# Altium PCB PCBAdamV3.PcbDoc (part 2 of 2)
Units mm, origin at the board's own origin, x right, y up, seen from the top; angles counter-clockwise.
Board outline 100 x 110 mm, 2 copper layers (Top Layer, Bottom Layer); 253 components, 163 nets, 741 pads, 188 vias.
Unrouted connection lines stored in the file: 6.
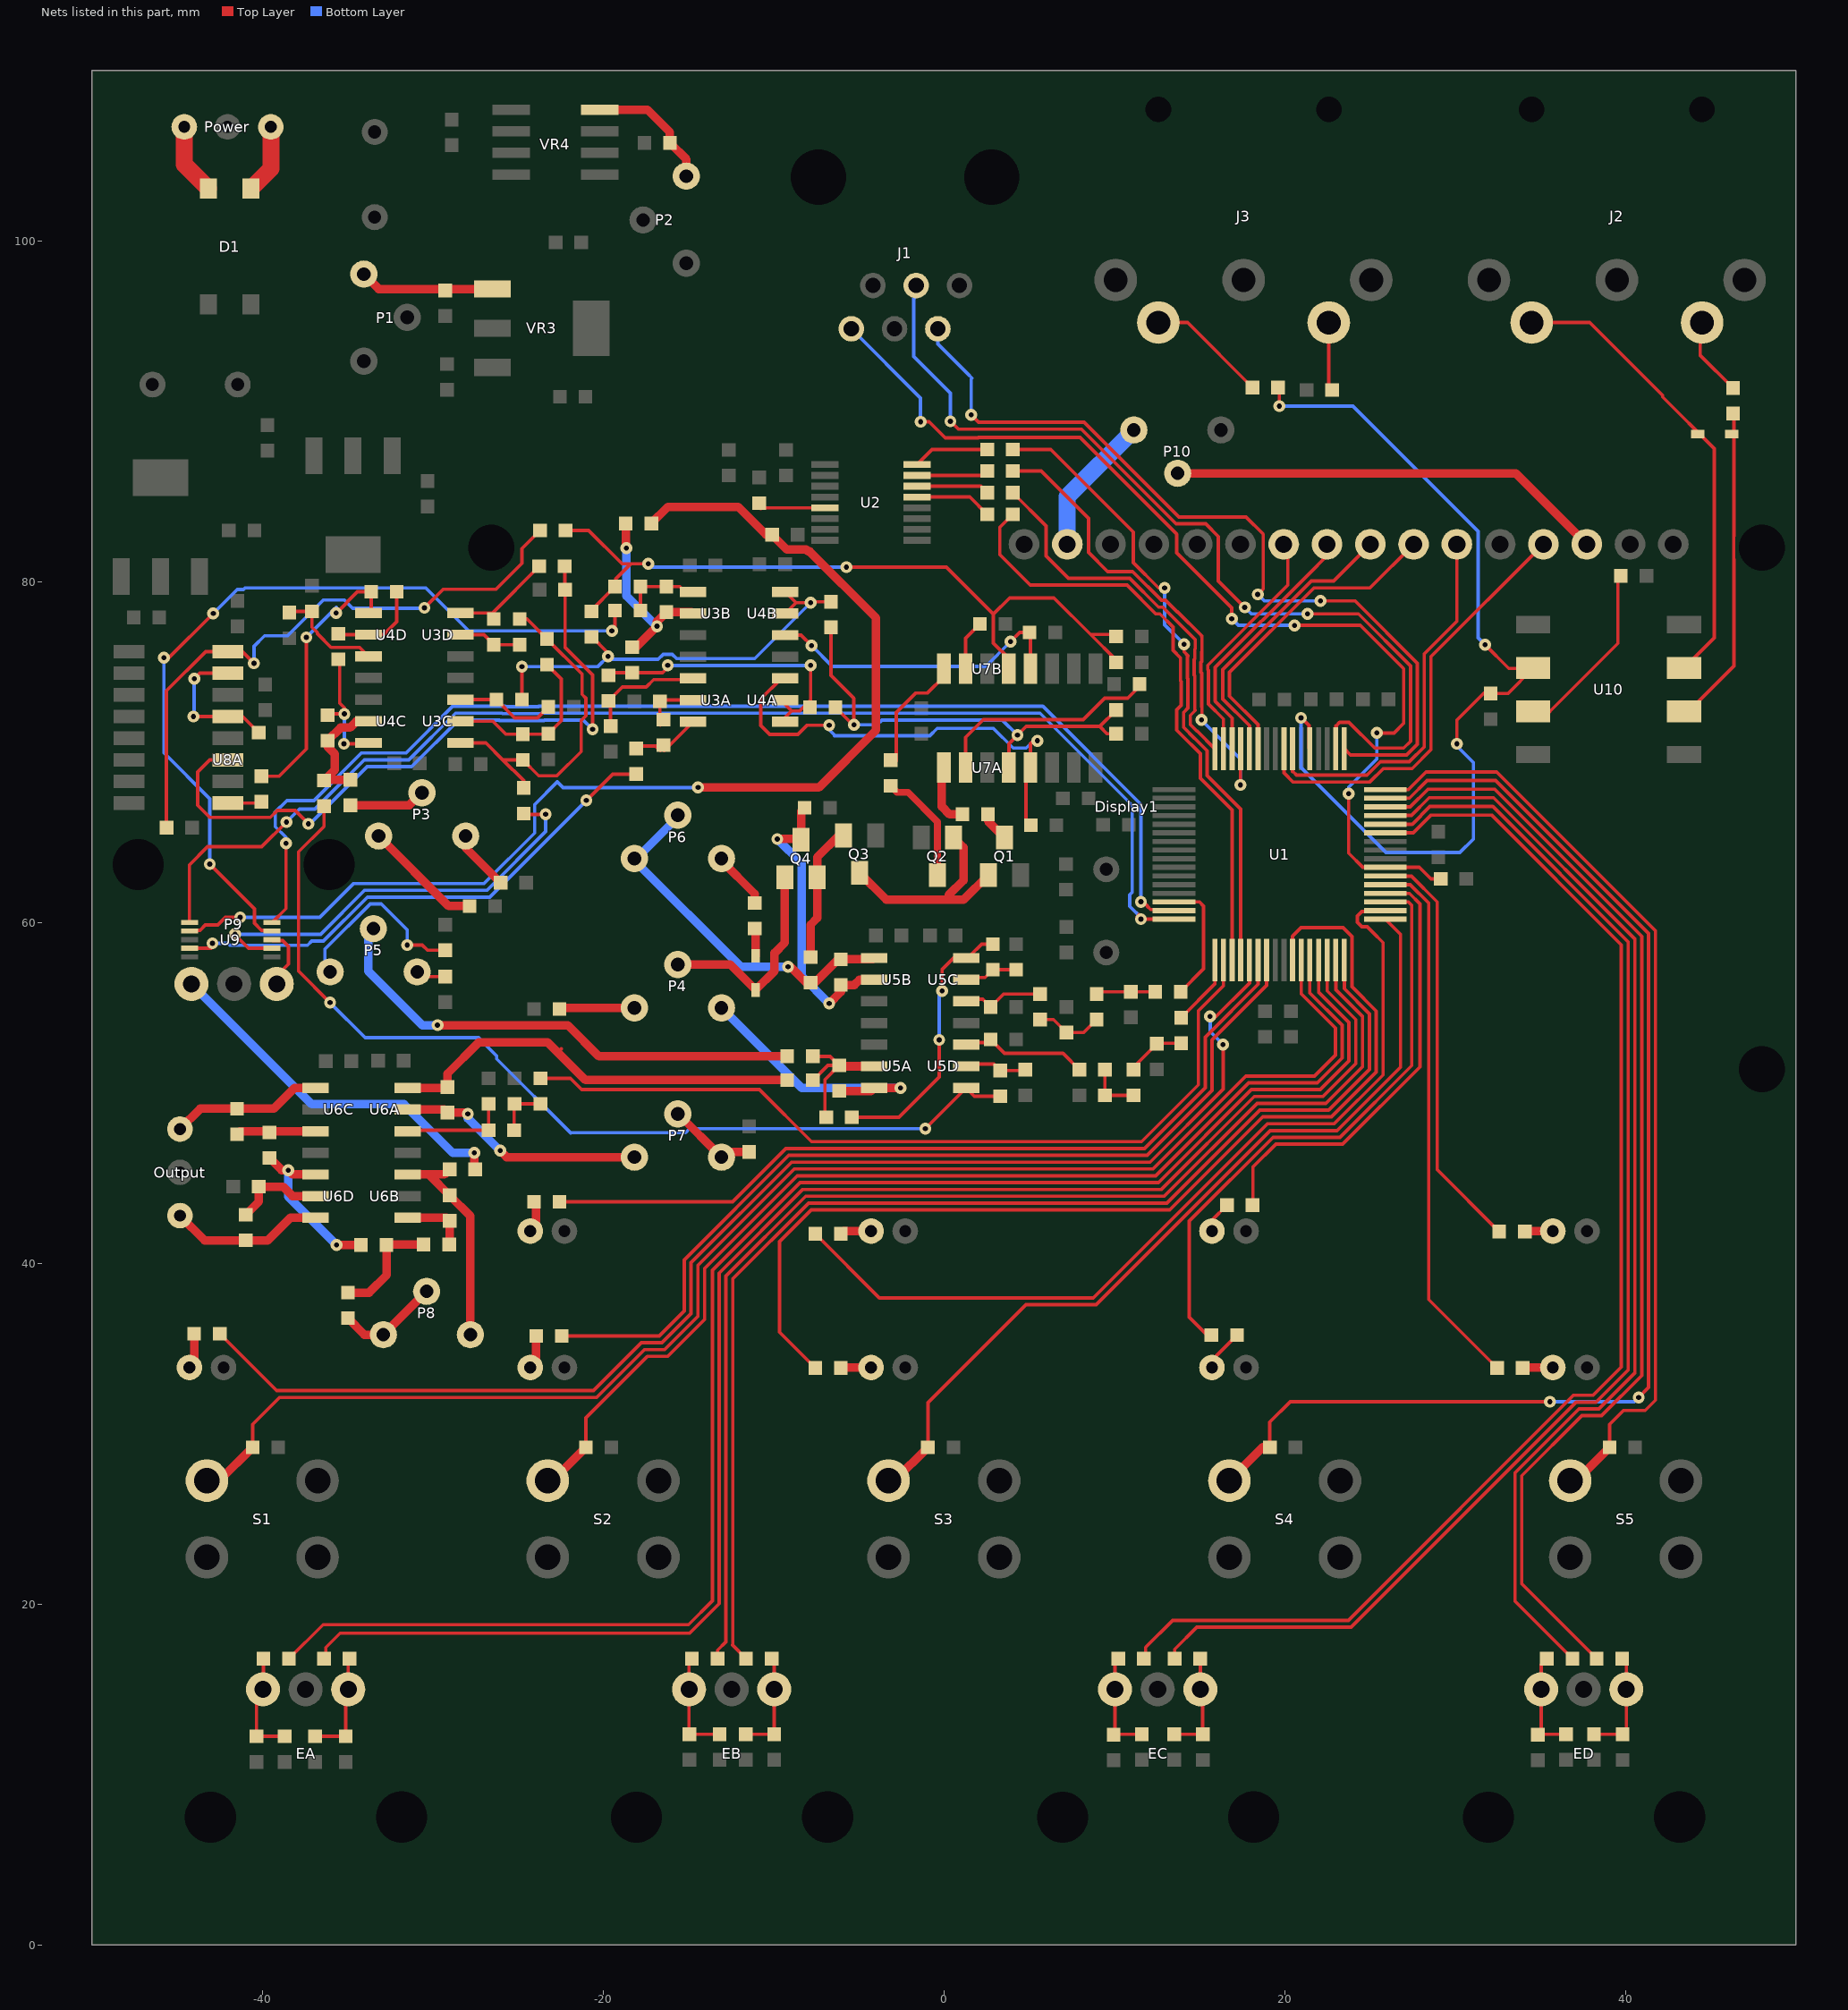
[diagram p2: the nets of this part, all layers, seen from the top]

## Via types
v1: diameter 0.7, hole 0.3, Top Layer to Bottom Layer, 171 vias
v2: diameter 1, hole 0.5, Top Layer to Bottom Layer, 17 vias

## Nets (pads, with @x,y where several pads share a name; then routed paths per layer and width w, separated by ;. In a path a pad name is that pad's centre, name@x,y a point inside that pad or via, vN(x,y) a via of type N, cw(c..) or ccw(c..) an arc to the next point about the centre after c; other vN are vias at no path point) (continued)
NetC19_2: C19.2 R17.1 U9.2 | length 69.3
  Top Layer w0.2: U9.2@-44.272,59.495 -44.222,59.545 -43.648,59.545 -43.342,59.851 -42.613,59.851 -42.164,60.3 v1(-41.3,60.3)
  Top Layer w0.5: R17.1@-17.17,83.414 -16.205,84.379 -12.068,84.379 -10.442,82.753 C19.2@-10.084,82.753 -9.22,81.89 -8.088,81.89 -7.971,81.773 -7.884,81.773 -3.988,77.876 -3.988,71.272 -7.341,67.92 v1(-14.427,67.92)
  Bottom Layer w0.2: v1(-41.3,60.3) -36.619,60.3 -34.631,62.287 -26.982,62.287 -24.018,65.251 -24.018,66.914 -22.682,68.25 -22.352,67.92 v1(-14.427,67.92)
NetC20_1: C20.1 U2.13 | length 3.8
  Top Layer w0.2: C20.1@-10.744,84.277 -10.693,84.328 U2.13@-6.985,84.328
NetC23_1: C23.1 R19.2 R36.2 U4B.1 U4B.2 | length 26.2
  Top Layer w0.2: C23.1@-24.765,73.076 v1(-24.765,75.006) ; R19.2@-20.701,76.81 -19.71,75.819 v1(-19.71,75.616) ; U4B.2@-9.314,78.13 -8.679,78.765 ; U4B.1@-9.314,79.4 -8.679,78.765 ; v1(-7.823,78.765) -8.679,78.765 ; v1@-7.772,78.816 R36.2@-6.629,78.816
  Bottom Layer w0.2: v1(-24.765,75.006) -20.32,75.006 v1(-19.71,75.616) -19.533,75.438 -16.769,75.438 -16.474,75.732 -15.936,75.732 -15.686,75.482 -11.106,75.482 v1(-7.823,78.765)
NetC23_2: C23.2 R22.1 U3C.3 | length 5.9
  Top Layer w0.2: U3C.3@-28.364,73.076 C23.2@-26.264,73.076 -25.197,72.009 -23.851,72.009 R22.1@-23.216,72.644
NetC25_1: C25.1 R20.2 R37.1 U4A.1 U4A.2 | length 17.2
  Top Layer w0.2: C25.1@-19.685,74.498 -19.533,74.651 R20.2@-18.288,74.651 -16.51,74.651 -16.205,74.955 v1(-16.205,75.082) ; U4A.1@-9.314,71.78 -9.314,72.034 -8.933,72.415 ; U4A.2@-9.314,73.05 -9.314,72.796 -8.933,72.415 ; v1(-7.823,75.082) -7.823,73.05 -8.458,72.415 -8.933,72.415
  Bottom Layer w0.2: v1(-16.205,75.082) v1(-7.823,75.082)
NetC25_2: C25.2 R25.1 U3A.3 | length 7.1
  Top Layer w0.2: R25.1@-19.558,71.526 -19.558,72.873 C25.2@-19.685,73 -18.872,73.812 -17.475,73.812 -17.037,74.251 -14.714,74.251 U3A.3@-14.714,74.32
NetC28_1: C28.1 R21.1 R24.1 U3C.2 | length 10.2
  Top Layer w0.2: U3C.2@-28.364,71.806 -26.467,71.806 -25.705,71.044 R21.1@-24.714,71.044 -23.241,71.044 R24.1@-23.216,71.069 -22.454,71.831 -22.454,74.295 C28.1@-23.292,75.133
NetC28_2: C28.2 R16.1 R21.2 R29.2 U3C.1 | length 20.4
  Top Layer w0.2: U3C.1@-28.364,70.536 -26.873,70.536 -25.883,69.545 ; R29.2@-24.892,77.8 -24.46,77.8 C28.2@-23.292,76.632 -21.234,74.574 -21.234,73.386 -21.017,73.168 -21.017,72.12 -21.285,71.852 -21.285,70.028 -22.708,68.605 -23.774,68.605 R21.2@-24.714,69.545 -25.883,69.545 ; R16.1@-24.663,67.894 -24.663,68.326 -25.883,69.545
NetC33_2: C33.2 U4A.3 U7A.5 | length 27.4
  Top Layer w0.2: U4A.3@-9.314,74.32 -9.543,74.32 -10.744,73.12 -10.744,71.552 -10.223,71.031 -8.564,71.031 -8.018,71.577 v1(-6.731,71.577) ; U7A.5@4.953,69.088 4.811,68.946 4.811,65.928 C33.2@5.156,65.583 ; U7A.5@5.08,69.088 5.08,70.485 5.258,70.663 v1(5.486,70.663)
  Bottom Layer w0.2: v1(-6.731,71.577) -7.006,71.577 -6.426,70.998 -6.426,70.953 -0.833,70.953 -0.396,71.389 2.906,71.389 4.064,70.231 4.826,70.231 5.258,70.663 v1(5.486,70.663)
NetC34_2: C34.2 U4B.3 U7B.5 | length 18
  Top Layer w0.2: U4B.3@-9.314,76.86 -8.382,76.86 v1(-7.772,76.251) ; v1@3.759,76.479 v1(3.912,76.479) 4.445,77.013 C34.2@5.029,77.013 ; U7B.5@5.08,74.888 5.08,76.733 C34.2@5.131,76.784
  Bottom Layer w0.2: v1(-7.772,76.251) -6.553,75.032 2.464,75.032 v1(3.912,76.479)
NetC36_1: C36.1 Q4.3 R57.2 U5B.2 | length 18
  Top Layer w0.2: U5B.2@-4.097,56.642 U5B.2@-3.842,56.642
  Top Layer w0.5: v1(-9.779,64.897) -8.425,64.897 Q4.3@-8.382,64.854 -8.382,66.523 R57.2@-8.179,66.726 ; v1(-6.731,55.245) -6.045,55.931 C36.1@-6.045,56.337 -5.258,56.337 -4.953,56.642 U5B.2@-4.097,56.642
  Bottom Layer w0.5: v1(-9.779,64.897) -8.344,63.462 -8.344,56.858 v1(-6.731,55.245)
NetC36_2: C36.2 P6.2 P6.3 R64.1 U5B.1 | length 21.3
  Top Layer w0.5: v1(-9.144,57.404) -9.017,57.404 -7.95,56.337 -7.696,56.337 -6.198,57.836 C36.2@-6.045,57.836 -4.173,57.836 U5B.1@-4.097,57.912
  Bottom Layer w0.5: P6.3@-15.621,66.167 -18.161,63.627 -11.938,57.404 v1(-9.144,57.404)
NetC39_2: C39.2 R66.2 R67.1 | length 3.5
  Top Layer w0.2: R67.1@8.966,55.804 9.093,55.931 C39.2@10.973,55.931 R66.2@12.395,55.931
NetC40_2: C40.2 R67.2 R68.1 | length 4
  Top Layer w0.2: R68.1@5.639,54.305 6.426,54.305 C40.2@7.188,53.543 8.204,53.543 R67.2@8.966,54.305
NetC41_2: C41.2 R72.2 R73.1 | length 3.5
  Top Layer w0.2: R73.1@11.125,51.359 11.125,51.511 C41.2@12.497,52.883 12.522,52.908 R72.2@13.919,52.908
NetC42_2: C42.2 R73.2 R74.1 | length 3.2
  Top Layer w0.2: R74.1@9.449,51.359 C42.2@9.449,49.86 R73.2@11.125,49.86
NetC43_2: C43.2 R77.2 R78.1 | length 3
  Top Layer w0.2: R78.1@-25.222,47.803 C43.2@-25.222,49.327 ; C43.2@-25.197,49.352 R77.2@-23.673,49.352
NetC44_2: C44.2 R78.2 U6A.3 | length 6.4
  Top Layer w0.2: U6A.3@-31.463,47.752 -31.412,47.803 R78.2@-26.721,47.803 C44.2@-26.721,49.479
NetC47_1: C47.1 C48.2 P8.1 U6B.3 | length 13
  Top Layer w0.5: U6B.3@-31.463,45.212 -30.226,45.212 ; C48.2@-29.007,45.517 -29.312,45.212 -30.226,45.212 ; P8.1@-27.783,35.814 -27.783,42.769 C47.1@-29.007,43.993 -30.226,45.212
NetC47_2: C47.2 R83.2 U6B.1 | length 3.9
  Top Layer w0.5: U6B.1@-31.463,42.672 -29.185,42.672 C47.2@-29.007,42.494 -29.007,41.123 R83.2@-29.032,41.097
NetC48_1: C48.1 P9.1 | length 21.7
  Top Layer w0.5: v1(-27.559,46.482) -27.559,45.568 C48.1@-27.508,45.517
  Bottom Layer w0.5: P9.1@-44.152,56.396 -37.095,49.339 -31.686,49.339 -28.829,46.482 v1(-27.559,46.482)
NetC49_1: C49.1 R81.1 R83.1 | length 6.7
  Top Layer w0.5: R81.1@-34.976,38.278 -33.731,38.278 -32.69,39.319 -32.69,41.097 R83.1@-30.531,41.097
NetC49_2: C49.2 R84.1 U6D.3 | length 10.1
  Top Layer w0.5: R84.1@-39.573,46.177 -38.862,45.466 v1(-38.481,45.466) -38.227,45.212 U6D.3@-36.863,45.212 ; v1(-35.636,41.072) C49.2@-34.214,41.072
  Bottom Layer w0.5: v1(-38.481,45.466) -38.481,43.917 v1(-35.636,41.072)
NetC50_2: C50.2 EA.2 R101.2 R109.2 | length 6.4
  Top Layer w0.2: R109.2@-39.929,16.797 -39.929,15.027 EA.2@-39.956,15 -40.335,14.621 R101.2@-40.335,12.243 C50.2@-38.684,12.243
NetC51_2: C51.2 EA.1 R102.1 R110.2 | length 6.3
  Top Layer w0.2: C51.2@-36.906,12.243 R102.1@-35.103,12.243 EA.1@-35.103,14.853 ; EA.1@-34.956,15 -34.956,16.721 R110.2@-34.874,16.803
NetC52_2: C52.2 EB.2 R103.2 R111.2 | length 6.3
  Top Layer w0.2: R111.2@-14.783,16.797 -14.956,16.624 EB.2@-14.956,15 -14.956,12.391 R103.2@-14.935,12.37 C52.2@-13.157,12.37
NetC53_2: C53.2 EB.1 R104.1 R112.2 | length 6.2
  Top Layer w0.2: C53.2@-11.633,12.37 R104.1@-9.957,12.37 ; R112.2@-10.109,16.803 -9.956,16.65 EB.1@-9.956,15 R104.1@-9.957,12.37
NetC54_2: C54.2 EC.2 R105.2 R113.2 | length 6.1
  Top Layer w0.2: R113.2@10.236,16.797 10.044,16.605 EC.2@10.044,15 10.044,12.424 9.99,12.37 C54.2@11.608,12.37
NetC55_2: C55.2 EC.1 R106.1 R114.2 | length 6
  Top Layer w0.2: C55.2@13.513,12.37 15.181,12.37 EC.1@15.181,14.863 ; R114.2@15.037,16.803 15.044,16.796 EC.1@15.044,15
NetC56_2: C56.2 ED.2 R107.2 R115.2 | length 6.3
  Top Layer w0.2: R115.2@35.382,16.797 35.044,16.459 ED.2@35.044,15 35.044,12.532 34.882,12.37 C56.2@36.5,12.37
NetC57_2: C57.2 ED.1 R108.1 R116.2 | length 6.3
  Top Layer w0.2: C57.2@38.151,12.37 39.819,12.37 40.044,12.595 ED.1@40.044,15 40.044,16.561 R116.2@39.802,16.803
NetD1_1: D1.1 Power.1 | length 4.2
  Top Layer w1: Power.1@-44.577,106.68 -44.577,104.483 D1.1@-43.16,103.066
NetD1_2: D1.2 Power.3 | length 4.1
  Top Layer w1: D1.2@-40.66,103.066 -39.497,104.229 Power.3@-39.497,106.68
NetD2_1: D2.1 J2.5 U10.3 | length 26.7
  Top Layer w0.2: J2.5@34.491,95.201 37.895,95.201 42.175,90.921 42.175,90.84 45.212,87.803 45.212,76.708 U10.3@43.942,75.438
NetD2_2: D2.2 R6.2 U10.2 | length 18
  Top Layer w0.2: U10.2@44.069,72.771 46.355,75.057 46.355,81.312 46.35,81.317 46.35,82.683 46.355,82.688 R6.2@46.355,89.865
NetD3_1: D3.1 P4.3 Q4.2 | length 12.5
  Top Layer w0.5: P4.3@-15.621,57.531 -12.54,57.531 D3.1@-11.049,56.04 -9.944,57.145 -9.944,58.204 -9.332,58.816 Q4.2@-9.332,62.654
NetD3_2: D3.2 R61.2 | length 1.6
  Top Layer w0.5: R61.2@-11.1,59.639 -11.049,59.588 D3.2@-11.049,58.04
NetD4_1: D4.1 R87.2 | length 1.7
  Top Layer w0.5: D4.1@-43.993,34.166 R87.2@-43.993,35.865
NetD5_1: D5.1 R88.2 | length 1.4
  Top Layer w0.5: D5.1@-23.927,42.232 R88.2@-23.927,43.612
NetD6_1: D6.1 R89.2 | length 1.5
  Top Layer w0.5: D6.1@-23.927,34.232 R89.2@-23.927,35.738
NetD7_1: D7.1 R95.2 | length 1.6
  Top Layer w0.5: R95.2@-5.888,41.889 D7.1@-4.27,41.889
NetD8_1: D8.1 R96.2 | length 1.7
  Top Layer w0.5: R96.2@-6.014,33.889 D8.1@-4.27,33.889
NetD9_1: D9.1 R97.2 | length 1.9
  Top Layer w0.2: D9.1@15.73,41.889 15.73,42.527 R97.2@16.612,43.409
NetD10_1: D10.1 R98.2 | length 2.5
  Top Layer w0.2: D10.1@15.73,33.889 15.73,34.323 R98.2@17.196,35.789
NetD11_1: D11.1 R99.2 | length 1.6
  Top Layer w0.5: R99.2@34.117,41.889 D11.1@35.73,41.889
NetD12_1: D12.1 R100.2 | length 1.7
  Top Layer w0.5: R100.2@33.991,33.889 D12.1@35.73,33.889
NetDisplay1_3: Display1.3 P10.3 | length 26.2
  Top Layer w0.5: P10.3@13.208,86.36 33.553,86.36 Display1.3@37.72,82.193
NetDisplay1_4: Display1.9 U1.30 | length 15.1
  Top Layer w0.2: U1.30@16.915,70.193 16.915,71.993 15.923,72.986 15.923,74.966 21.395,80.439 22.48,81.523 Display1.9@22.48,82.193
NetDisplay1_6: Display1.10 U1.31 | length 14.4
  Top Layer w0.2: U1.31@16.399,70.193 16.399,71.944 15.523,72.82 15.523,74.8 15.481,74.842 15.481,75.09 20.183,79.792 20.183,81.95 Display1.10@19.94,82.193
NetDisplay1_7: Display1.6 U1.23 | length 22.5
  Top Layer w0.2: U1.23@20.455,70.193 20.455,68.843 20.497,68.843 20.697,68.643 24.359,68.643 24.36,68.644 24.829,68.644 25.616,69.431 27.313,69.431 28.182,70.3 28.182,75.76 30.1,77.679 Display1.6@30.1,82.193
NetDisplay1_8: Display1.4 U1.24 | length 25.8
  Top Layer w0.2: U1.24@19.955,70.193 19.955,68.777 20.489,68.243 24.525,68.243 24.526,68.244 24.995,68.244 25.782,69.031 27.479,69.031 28.582,70.134 28.582,75.595 Display1.4@35.18,82.193
NetDisplay1_9: Display1.7 U1.27 | length 19.1
  Top Layer w0.2: U1.27@18.431,70.193 18.431,71.609 16.764,73.276 16.764,74.676 21.717,79.629 24.996,79.629 Display1.7@27.56,82.193
NetDisplay1_10: Display1.8 U1.28 | length 17
  Top Layer w0.2: U1.28@17.931,70.193 17.931,71.543 16.364,73.11 16.364,74.842 21.561,80.039 22.866,80.039 Display1.8@25.02,82.193
NetDisplay1_15: Display1.15 P10.1 | length 8.3
  Bottom Layer w1: Display1.15@7.24,82.193 7.24,84.994 P10.1@11.146,88.9
NetJ1_1: J1.1 R3.1 U1.7 | length 61.1
  Top Layer w0.2: v1(-1.372,89.383) -0.864,89.383 0.076,88.443 2.002,88.443 2.016,88.457 7.987,88.457 13.66,82.784 13.66,81.696 16.893,78.463 v1(16.893,77.813) ; v1(20.576,77.432) 24.434,77.432 26.982,74.884 26.982,71.686 26.416,71.12 v1(25.4,71.12) ; v1(23.749,67.564) 23.749,64.065 24.576,63.238 U1.7@25.9,63.238 27.897,63.238 28.575,62.56 R3.1@28.905,62.56
  Bottom Layer w0.2: J1.1@-5.437,94.836 -1.376,90.775 -1.372,90.78 v1(-1.372,89.383) ; v1(16.893,77.813) 17.274,77.432 v1(20.576,77.432) ; v1(23.749,67.564) 23.749,67.945 25.4,69.596 v1(25.4,71.12)
NetJ1_4: J1.4 U1.18 | length 53.9
  Top Layer w0.2: v1(0.381,89.408) 0.838,88.951 8.059,88.951 13.616,83.393 15.357,83.393 16.104,82.646 16.104,80.035 v1(17.653,78.486) ; v1(21.336,78.105) 24.326,78.105 27.382,75.05 27.382,70.631 26.982,70.231 25.281,70.231 23.769,71.743 23.221,71.743 23.045,71.567 23.045,71.493 22.995,71.543 U1.18@22.995,70.193
  Bottom Layer w0.2: J1.4@-1.627,96.741 -1.778,96.59 -1.778,93.218 0.381,91.059 v1(0.381,89.408) ; v1(17.653,78.486) 18.034,78.105 v1(21.336,78.105)
NetJ1_5: J1.5 U1.17 | length 50.1
  Top Layer w0.2: v1(1.6,89.789) 2.038,89.351 8.224,89.351 13.782,83.793 17.731,83.793 18.74,82.784 18.74,79.573 v1(18.415,79.248) ; v1(22.098,78.867) 24.13,78.867 27.782,75.215 27.782,70.465 27.147,69.831 23.857,69.831 U1.17@23.495,70.193
  Bottom Layer w0.2: J1.5@-0.357,94.836 -0.357,93.947 1.397,92.193 1.651,91.939 1.6,91.888 v1(1.6,89.789) ; v1(18.415,79.248) 18.796,78.867 v1(22.098,78.867)
NetJ2_4: J2.4 R6.1 | length 4.7
  Top Layer w0.2: J2.4@44.491,95.201 44.374,95.084 44.374,93.294 R6.1@46.304,91.364
NetJ3_4: J3.4 R5.1 | length 3.8
  Top Layer w0.2: R5.1@22.585,91.436 J3.4@22.585,95.201
NetJ3_5: J3.5 R8.1 | length 7.1
  Top Layer w0.2: J3.5@12.585,95.201 14.298,95.201 R8.1@18.11,91.389
NetJ4_1: Output.1 R82.2 U6C.1 | length 9
  Top Layer w0.5: Output.1@-44.831,47.879 -43.637,49.073 R82.2@-41.478,49.073 -39.319,49.073 -38.1,50.292 U6C.1@-36.863,50.292
NetJ4_2: Output.3 R85.1 U6D.1 | length 9.1
  Top Layer w0.5: Output.3@-44.831,42.799 -43.383,41.351 R85.1@-40.97,41.351 -39.675,41.351 -38.354,42.672 U6D.1@-36.863,42.672
NetP1_2: P1.2 R1.1 VR3.2 | length 7.9
  Top Layer w0.5: P1.2@-34.036,98.044 -33.161,97.169 VR3.2@-26.501,97.169
NetP2_1: P2.1 R2.2 VR4.2 | length 7.7
  Top Layer w0.5: VR4.2@-20.2,107.696 -17.399,107.696 -16.078,106.375 R2.2@-16.078,105.74 -15.113,104.775 P2.1@-15.113,103.789
NetP3_1: P3.1 R44.1 | length 3.6
  Top Layer w0.5: P3.1@-28.062,65.075 -28.062,64.384 R44.1@-26.01,62.332
NetP3_2: P3.2 R43.2 | length 7
  Top Layer w0.5: P3.2@-33.172,65.075 -29.058,60.96 R43.2@-27.838,60.96
NetP3_3: P3.3 R45.1 | length 4.5
  Top Layer w0.5: R45.1@-34.823,66.878 -31.369,66.878 P3.3@-30.632,67.615
NetP4_1: P4.1 R53.2 U5A.1 | length 16.1
  Top Layer w0.5: R53.2@-6.147,50.114 -4.275,50.114 U5A.1@-4.097,50.292 v1(-2.54,50.292)
  Bottom Layer w0.5: P4.1@-13.051,54.991 -8.352,50.292 v1(-2.54,50.292)
NetP4_2: P4.2 R63.1 | length 4.4
  Top Layer w0.5: R63.1@-22.555,54.915 -22.479,54.991 P4.2@-18.161,54.991
NetP5_1: P5.1 R60.1 | length 2.1
  Top Layer w0.2: P5.1@-31.212,57.277 -30.755,56.82 R60.1@-29.261,56.82
NetP5_2: P5.2 R59.2 | length 11
  Top Layer w0.2: v1(-31.496,58.674) -30.607,58.674 -30.302,58.369 R59.2@-29.261,58.369
  Bottom Layer w0.2: P5.2@-36.322,57.277 -36.322,58.432 -33.667,61.087 -33.02,61.087 -31.496,59.563 v1(-31.496,58.674)
NetP5_3: P5.3 R62.1 | length 29.3
  Top Layer w0.5: v1(-29.718,53.975) -22.073,53.975 -20.244,52.146 R62.1@-9.195,52.146
  Bottom Layer w0.5: P5.3@-33.782,59.817 -33.782,57.15 -30.607,53.975 v1(-29.718,53.975)
NetP6_1: P6.1 R61.1 | length 3.3
  Top Layer w0.5: P6.1@-13.051,63.627 -11.1,61.676 R61.1@-11.1,61.138
NetP7_1: P7.1 P7.3 R80.1 | length 5.4
  Top Layer w0.5: P7.3@-15.621,48.768 -15.591,48.768 P7.1@-13.051,46.228 -12.746,46.533 R80.1@-11.43,46.533
NetP7_2: P7.2 R79.2 U6A.2 | length 15
  Top Layer w0.5: U6A.2@-31.463,49.022 -29.312,49.022 R79.2@-29.134,48.844 v1@-28.016,48.844 ; v1(-26.035,46.609) -25.654,46.228 P7.2@-18.161,46.228 P7.2@-18.542,46.609
  Bottom Layer w0.5: v1(-27.94,48.768) -27.94,48.514 v1(-26.035,46.609)
NetP8_2: P8.2 P8.3 R81.2 | length 6.1
  Top Layer w0.5: R81.2@-34.976,36.779 -34.011,35.814 P8.2@-32.893,35.814 P8.3@-30.353,38.354
NetP9_2: P9.2 U9.8 | length 3.6
  Top Layer w0.2: U9.8@-39.425,58.987 -39.375,58.937 -38.801,58.937 -38.456,58.591 -38.456,57.556 -39.152,56.86 P9.2@-39.152,56.396
NetQ1_2: Q1.2 Q2.2 Q3.3 | length 12.8
  Top Layer w0.5: Q3.3@-4.953,62.908 -3.386,61.341 1.166,61.341 Q1.2@2.606,62.781 ; 0.29,61.631 0.305,61.631 1.143,62.469 1.143,64.407 Q2.2@0.569,64.981
NetQ1_3: Q1.3 R51.1 | length 1.8
  Top Layer w0.5: R51.1@2.591,66.345 2.591,65.946 Q1.3@3.556,64.981
NetQ2_3: Q2.3 R52.1 | length 6.7
  Top Layer w0.4: R52.1@-3.124,68.021 -2.743,67.64 -2.108,67.64 -0.381,65.913 Q2.3@-0.381,62.781
NetQ3_1: Q3.1 Q4.1 R64.2 | length 7.8
  Top Layer w0.5: R64.2@-7.823,57.963 -7.823,59.868 -7.432,60.259 -7.432,61.783 -7.432,62.781 -7.432,63.833 Q3.1@-6.157,65.108
NetR7_1: R7.1 R8.2 U1.21 U10.6 | length 56.3
  Top Layer w0.2: v1(19.685,90.297) R8.2@19.685,91.313 ; v1(20.955,72.009) 20.979,72.009 21.421,71.567 21.421,70.243 U1.21@21.471,70.193 ; v1(30.099,70.485) 30.099,71.882 31.674,73.457 ; v1(31.75,76.302) 33.147,74.905 34.566,74.905 33.093,73.431 R7.1@32.08,73.431
  Bottom Layer w0.2: v1@19.685,90.424 v1(19.685,90.297) 24.003,90.297 31.344,82.956 31.344,76.708 v1(31.75,76.302) v1@31.729,76.302 ; v1(20.955,72.009) 20.955,69.088 25.942,64.101 30.28,64.101 31.076,64.897 31.076,69.381 30.099,70.358 v1(30.099,70.485)
NetR9_2: R9.2 U10.7 | length 10.6
  Top Layer w0.2: U10.7@34.566,72.365 U10.7@35.56,72.365 ; U10.7@35.56,72.39 39.548,76.378 R9.2@39.548,80.34
NetR10_1: R10.1 U1.51 | length 35.8
  Top Layer w0.2: R10.1@4.039,83.947 3.277,83.185 3.277,81.585 5.068,79.793 10.739,79.793 12.427,78.105 12.673,78.105 13.447,77.331 13.447,75.961 13.881,75.527 13.881,74.179 13.923,74.138 13.923,72.742 13.663,72.483 13.663,71.281 14.512,70.432 14.529,70.432 15.049,69.912 15.049,68.459 16.915,66.593 U1.51@16.915,57.793
NetR10_2: R10.2 U2.5 | length 4.5
  Top Layer w0.2: U2.5@-1.585,84.963 1.524,84.963 R10.2@2.54,83.947
NetR11_1: R11.1 U1.32 | length 22.5
  Top Layer w0.2: R11.1@4.039,85.217 5.994,83.261 5.994,81.509 7.31,80.193 10.905,80.193 12.593,78.505 12.838,78.505 14.747,76.596 14.747,76.058 14.723,76.033 14.723,75.463 14.681,75.422 14.681,74.51 14.723,74.469 14.723,72.489 14.747,72.464 14.747,72.435 14.463,72.151 14.463,71.613 14.844,71.232 14.86,71.232 U1.32@15.899,70.193
NetR11_2: R11.2 U2.6 | length 4.3
  Top Layer w0.2: U2.6@-1.585,85.598 2.159,85.598 R11.2@2.54,85.217
NetR12_1: R12.1 U1.29 | length 28.2
  Top Layer w0.2: R12.1@4.039,86.487 5.715,86.487 8.484,83.718 8.484,81.712 9.602,80.593 11.071,80.593 12.759,78.905 13.004,78.905 13.677,78.232 13.716,78.232 15.123,76.825 15.123,76.786 15.147,76.762 15.147,75.892 15.123,75.868 15.123,75.297 15.081,75.256 15.081,74.676 15.123,74.635 15.123,72.654 15.147,72.63 15.147,71.916 v1(15.113,71.882) ; v1(17.399,68.072) 17.399,70.177 U1.29@17.415,70.193
  Bottom Layer w0.2: v1(15.113,71.882) 17.399,69.596 v1(17.399,68.072)
NetR12_2: R12.2 U2.7 | length 4.2
  Top Layer w0.2: U2.7@-1.585,86.233 2.286,86.233 R12.2@2.54,86.487
NetR13_1: R13.1 U1.52 | length 37.3
  Top Layer w0.2: R13.1@4.039,87.757 6.274,87.757 11.12,82.911 11.12,81.109 12.6,79.629 v1(12.954,79.629) ; v1(14.097,76.327) 14.097,75.877 14.323,75.651 14.323,75.629 14.281,75.587 14.281,74.345 14.323,74.303 14.323,72.577 14.063,72.317 14.063,71.447 14.678,70.832 14.694,70.832 15.449,70.077 15.449,68.625 17.415,66.659 U1.52@17.415,57.793
  Bottom Layer w0.2: v1(12.954,79.629) 12.954,77.47 v1(14.097,76.327)
NetR13_2: R13.2 U2.8 | length 4.5
  Top Layer w0.2: U2.8@-1.585,86.868 -0.696,87.757 R13.2@2.54,87.757
NetR14_1: R14.1 R17.2 R20.1 U3B.2 | length 11.4
  Top Layer w0.2: U3B.2@-14.79,78.207 U3B.2@-14.714,78.13
  Top Layer w0.5: R17.2@-18.669,83.414 -18.669,81.991 v1(-18.636,81.958) ; R20.1@-18.288,76.149 -18.072,76.149 v1(-16.84,77.381) -16.84,77.648 R14.1@-16.281,78.207 U3B.2@-14.79,78.207
  Bottom Layer w0.5: v1(-18.636,81.958) -18.636,79.164 -16.853,77.381 v1(-16.84,77.381)
NetR14_2: R14.2 R15.1 R18.1 U3B.1 | length 4.6
  Top Layer w0.2: R15.1@-17.805,78.308 R18.1@-17.805,79.705 R14.2@-16.281,79.705 -15.494,79.705 -15.189,79.4 U3B.1@-14.714,79.4
NetR15_2: R15.2 U9.9 | length 49.1
  Top Layer w0.2: v1@-45.568,75.438 v1(-42.875,78.13) ; v1(-43.078,63.424) -40.462,60.808 -40.462,59.958 -40.049,59.545 -39.475,59.545 U9.9@-39.425,59.495 ; v1(-19.482,77.114) -19.304,77.292 R15.2@-19.304,78.308
  Bottom Layer w0.2: v1(-45.771,75.54) -45.771,69.952 -43.078,67.259 v1(-43.078,63.424) ; v1(-42.875,78.13) -41.468,79.538 -41.107,79.538 -41.016,79.629 -30.404,79.629 -27.889,77.114 v1(-19.482,77.114)
NetR16_2: R16.2 U9.7 | length 25.6
  Top Layer w0.2: v1(-41.605,59.309) -41.605,59.284 -40.808,58.487 U9.7@-39.425,58.487 ; R16.2@-24.663,66.396 -24.613,66.345 v1(-23.368,66.345)
  Bottom Layer w0.2: v1(-41.605,59.309) -36.576,59.309 -33.998,61.887 -26.817,61.887 -23.368,65.336 v1(-23.368,66.345)
NetR18_2: R18.2 R19.1 R32.1 R33.1 R34.1 U7B.4 | length 45.2
  Top Layer w0.2: R34.1@-22.2,83.007 -20.853,83.007 -18.898,81.051 -18.364,81.051 ; R19.1@-20.701,78.308 R18.2@-19.304,79.705 -19.253,79.756 -19.253,80.162 -18.364,81.051 ; v1(-17.348,81.051) -18.364,81.051 ; v1(-5.715,80.848) 0.149,80.848 2.907,78.091 ; U7B.4@3.81,74.888 3.81,75.489 2.907,76.392 2.907,78.091 ; R33.1@10.109,75.26 10.109,75.393 8.604,76.898 ; R32.1@10.109,76.784 9.995,76.898 8.604,76.898 ; 2.907,78.091 3.861,79.045 6.457,79.045 8.604,76.898
  Bottom Layer w0.2: v1(-17.348,81.051) -17.145,80.848 v1(-5.715,80.848)
NetR23_1: R23.1 R26.2 U3A.1 | length 4.3
  Top Layer w0.2: R23.1@-18.186,69.926 -17.755,70.358 -16.916,70.358 R26.2@-16.637,70.079 ; R26.2@-16.416,70.079 U3A.1@-14.714,71.78
NetR23_2: R23.2 U9.4 | length 30.7
  Top Layer w0.2: U9.4@-44.272,58.487 -42.986,58.487 -42.926,58.547 v1(-42.926,58.776) ; v1(-20.98,67.158) -19.431,68.707 R23.2@-18.059,68.707
  Bottom Layer w0.2: v1(-42.926,58.776) -42.067,58.776 -42.042,58.801 -41.9,58.659 -37.348,58.659 -37.098,58.909 -36.41,58.909 -33.832,61.487 -26.651,61.487 v1(-20.98,67.158)
NetR26_1: R26.1 R27.1 U3A.2 | length 3.4
  Top Layer w0.2: R26.1@-16.637,71.577 -16.662,71.603 R27.1@-16.662,72.974 -16.586,73.05 U3A.2@-14.714,73.05
NetR28_1: R28.1 R29.1 U3D.2 | length 3.7
  Top Layer w0.2: U3D.2@-28.364,76.886 -27,76.886 R28.1@-26.416,76.302 R29.1@-24.892,76.302
NetR28_2: R28.2 R35.1 U3D.1 | length 5.8
  Top Layer w0.2: U3D.1@-28.364,78.156 -26.492,78.156 R35.1@-23.749,80.899
NetR30_1: R30.1 R31.1 R36.1 R37.2 U7A.4 | length 27.5
  Top Layer w0.2: R36.1@-6.629,77.318 -6.629,74.498 -5.283,73.152 v1(-5.283,71.603) -5.343,71.603 R37.2@-6.359,72.619 ; U7A.4@3.81,69.088 3.81,70.485 v1(4.318,70.993) 4.826,71.501 9.144,71.501 ; R30.1@10.109,71.069 9.576,71.069 9.144,71.501 ; R31.1@10.109,72.466 9.144,71.501
  Bottom Layer w0.2: v1(-5.283,71.603) -3.912,71.603 -3.632,71.882 3.429,71.882 v1(4.318,70.993)
NetR34_2: R34.2 R40.2 U8C.2 | length 35.9
  Top Layer w0.2: R40.2@-45.618,65.557 -45.618,73.593 -43.317,75.895 U8C.2@-42.012,75.895 -41.173,75.895 v1(-40.488,75.209) ; v1(-30.48,78.461) -29.388,79.553 -26.289,79.553 -24.765,81.077 -24.765,81.94 R34.2@-23.698,83.007
  Bottom Layer w0.2: v1(-40.488,75.209) -40.488,76.205 -39.868,76.825 -38.517,76.825 -36.424,78.918 -35.179,78.918 -34.696,78.435 -30.505,78.435 v1(-30.48,78.461)
NetR35_2: R35.2 R41.1 U8A.3 | length 41
  Top Layer w0.2: U8A.3@-42.012,69.545 -43.078,69.545 -43.79,68.834 -43.79,66.878 -43.078,66.167 -39.522,66.167 -39.116,66.573 -38.075,66.573 v1(-37.287,65.786) ; R41.1@-22.25,79.553 R35.2@-22.25,80.899 ; R41.1@-22.225,79.527 -22.225,76.131 -20.617,74.523 v1(-20.617,71.341)
  Bottom Layer w0.2: v1(-37.287,65.786) -37.204,65.786 -33.845,69.145 -31.229,69.145 -28.492,71.882 -26.096,71.882 -26.07,71.856 -23.46,71.856 -23.434,71.882 -21.158,71.882 v1(-20.617,71.341)
NetR38_2: R38.2 U7B.2 | length 2.6
  Top Layer w0.2: U7B.2@1.219,74.939 U7B.2@1.27,74.888 1.27,76.683 R38.2@1.791,77.203
NetR39_2: R39.2 U7A.2 | length 13.4
  Top Layer w0.2: U7A.2@1.27,69.088 1.27,70.866 2.305,71.901 8.172,71.901 9.438,73.166 10.784,73.166 R39.2@11.608,73.99
NetR42_1: R42.1 U8A.5 U8C.1 | length 8.6
  Top Layer w0.2: v1(-44.044,72.085) U8A.5@-42.012,72.085 -41.148,72.085 R42.1@-40.208,71.145 ; v1(-43.993,74.295) -43.663,74.625 U8C.1@-42.012,74.625
  Bottom Layer w0.2: v1(-44.044,72.085) -43.993,72.136 v1(-43.993,74.295)
NetR45_2: R45.2 R46.1 R49.2 U4C.2 | length 7.1
  Top Layer w0.5: R49.2@-36.373,68.326 -35.738,68.961 -35.738,69.887 -36.17,70.319 R46.1@-36.17,70.358 ; R49.2@-36.322,68.377 R45.2@-34.823,68.377 R45.2@-34.989,68.543 ; R46.1@-36.17,70.663 -35.395,71.438 -34.848,71.438 -34.479,71.806 U4C.2@-33.764,71.806
NetR46_2: R46.2 R50.1 U4C.1 | length 7.7
  Top Layer w0.2: R46.2@-36.17,71.857 -35.789,72.238 v1(-35.179,72.238) -35.179,72.593 -35.458,72.873 -35.458,75.362 R50.1@-35.535,75.438 ; v1(-35.204,70.485) -33.815,70.485 U4C.1@-33.764,70.536
  Bottom Layer w0.2: v1(-35.204,70.485) -35.179,70.51 v1(-35.179,72.238)
NetR47_1: R47.1 U8A.1 | length 2
  Top Layer w0.2: U8A.1@-42.012,67.005 -40.132,67.005 R47.1@-40.056,67.081
NetR47_2: R47.2 R48.2 U4D.1 | length 16.6
  Top Layer w0.2: R47.2@-40.056,68.58 -39.014,68.58 -37.941,69.653 -37.941,69.66 -37.707,69.894 -37.7,69.894 -37.414,70.18 v1(-37.414,76.733) ; v1(-35.662,78.156) -34.417,79.4 R48.2@-33.604,79.4 -33.604,78.316 U4D.1@-33.764,78.156
  Bottom Layer w0.2: v1(-37.414,76.733) -35.662,78.486 v1(-35.662,78.156)
NetR48_1: R48.1 R50.2 U4D.2 | length 5.4
  Top Layer w0.2: R50.2@-35.484,76.886 U4D.2@-33.764,76.886 -32.868,76.886 -32.106,77.648 R48.1@-32.106,79.4
NetR49_1: R49.1 R76.1 U5D.1 | length 56.8
  Top Layer w0.2: R49.1@-36.373,66.827 -36.373,65.637 -37.868,64.142 -37.868,57.147 v1(-36.017,55.296) ; v1(-1.092,47.897) U5D.1@1.303,50.292 1.786,49.809 R76.1@3.302,49.809
  Bottom Layer w0.2: v1(-36.017,55.296) -33.96,53.238 -27.315,53.238 -26.247,52.171 -26.247,51.998 -21.9,47.65 -21.882,47.668 -15.165,47.668 -14.937,47.897 v1(-1.092,47.897)
NetR51_2: R51.2 U7A.1 | length 4.1
  Top Layer w0.5: U7A.1@-0.127,69.469 -0.127,66.802 0.33,66.345 R51.2@1.092,66.345
NetR52_2: R52.2 U7B.1 | length 7
  Top Layer w0.2: R52.2@-2.794,69.469 -2.794,72.319 -1.646,73.467 -0.955,73.467 0,74.422 U7B.1@0,74.888
NetR53_1: R53.1 R54.2 R58.2 R62.2 U5A.2 | length 9.2
  Top Layer w0.2: R54.2@-7.747,50.673 -6.807,51.613 R53.1@-6.147,51.613 ; R62.2@-7.696,52.146 -6.68,52.146 R53.1@-6.147,51.613 ; R58.2@-6.909,48.565 -6.985,48.641 -6.985,50.775 R53.1@-6.147,51.613
  Top Layer w0.5: R53.1@-6.096,51.562 U5A.2@-4.097,51.562
NetR54_1: R54.1 R79.1 U6A.1 | length 24.8
  Top Layer w0.2: -22.464,52.593 -22.449,52.578
  Top Layer w0.5: U6A.1@-31.463,50.292 -29.185,50.292 R79.1@-29.134,50.343 -29.134,51.13 -27.305,52.959 -23.241,52.959 -21.031,50.749 R54.1@-9.195,50.749
NetR55_2: R55.2 R56.1 U4D.3 | length 6.3
  Top Layer w0.2: R55.2@-38.405,78.181 -38.329,78.257 R56.1@-37.084,78.257 -37.084,77.322 -36.764,77.003 -36.764,76.942 -35.96,76.138 -34.286,76.138 U4D.3@-33.764,75.616
NetR58_1: R58.1 R70.1 U5C.1 | length 15.8
  Top Layer w0.2: R58.1@-5.41,48.565 -2.642,48.565 -0.279,50.927 v1(-0.279,53.111) ; v1(-0.102,55.982) -0.102,57.252 0.559,57.912 U5C.1@1.303,57.912 ; U5C.1@1.524,58.039 2.21,58.725 R70.1@2.87,58.725
  Bottom Layer w0.2: v1(-0.279,53.111) -0.279,55.804 v1(-0.102,55.982)
NetR65_2: R65.2 R68.2 U5C.3 | length 5.1
  Top Layer w0.2: U5C.3@1.049,55.499 2.286,55.499 R65.2@2.743,55.042 3.505,55.804 R68.2@5.639,55.804
NetR66_1: R66.1 U1.46 | length 7.4
  Top Layer w0.2: U1.46@13.5,61.206 14.994,61.206 15.24,60.96 15.24,57.277 R66.1@13.894,55.931
NetR69_1: R69.1 R70.2 U5C.2 | length 3.4
  Top Layer w0.2: U5C.2@1.049,56.769 2.413,56.769 R70.2@2.87,57.226 R69.1@4.242,57.226
NetR71_2: R71.2 R74.2 U5D.3 | length 7.7
  Top Layer w0.2: U5D.3@1.049,52.959 2.565,52.959 R71.2@2.743,53.137 3.556,52.324 6.985,52.324 R74.2@7.95,51.359
NetR72_1: R72.1 U1.49 | length 4.2
  Top Layer w0.2: R72.1@13.919,54.407 15.899,56.387 U1.49@15.899,57.793
NetR75_1: R75.1 R76.2 U5D.2 | length 3.9
  Top Layer w0.2: U5D.2@1.049,51.689 2.921,51.689 R76.2@3.302,51.308 4.724,51.308 R75.1@4.775,51.359
NetR77_1: R77.1 U1.50 | length 49.5
  Top Layer w0.2: R77.1@-23.673,50.851 -21.911,50.851 -21.259,50.199 -10.829,50.199 -7.766,47.136 11.599,47.136 14.933,50.47 14.933,54.811 16.399,56.277 U1.50@16.399,57.793
NetR82_1: R82.1 R84.2 U6C.3 | length 4.7
  Top Layer w0.5: R82.1@-41.478,47.574 -41.3,47.752 U6C.3@-36.863,47.752
NetR85_2: R85.2 R86.1 U6D.2 | length 5.5
  Top Layer w0.5: R85.2@-40.97,42.85 -40.208,43.612 R86.1@-40.208,44.501 -38.786,44.501 -38.227,43.942 U6D.2@-36.863,43.942
NetR87_1: R87.1 U1.53 | length 78.7
  Top Layer w0.2: R87.1@-42.494,35.865 -39.16,32.531 -20.555,32.531 -17.748,35.338 -16.548,35.338 -14.84,37.045 -14.84,40.036 -8.94,45.936 12.096,45.936 16.383,50.223 v1(16.383,52.832) ; v1(15.621,54.483) 15.717,54.483 15.844,54.356 17.931,56.443 U1.53@17.931,57.793
  Bottom Layer w0.2: v1@15.748,54.356 v1(15.621,54.483) 15.621,53.594 v1(16.383,52.832)
NetR88_1: R88.1 U1.54 | length 49.3
  Top Layer w0.2: R88.1@-22.428,43.612 -12.395,43.612 -9.271,46.736 11.765,46.736 15.333,50.304 15.333,53.276 18.431,56.374 U1.54@18.431,57.793
NetR89_1: R89.1 U1.55 | length 54.9
  Top Layer w0.2: R89.1@-22.428,35.738 -16.713,35.738 -15.24,37.211 -15.24,40.201 -9.105,46.336 11.931,46.336 15.733,50.138 15.733,53.101 18.939,56.307 U1.55@18.939,57.793
NetR90_1: R91.1 S4.1 U1.15 | length 74
  Top Layer w0.2: R91.1@19.126,29.203 19.126,30.683 20.32,31.877 v1(35.56,31.877) ; U1.15@25.9,67.294 27.316,67.294 28.356,68.334 32.37,68.334 41.351,59.353 41.351,32.715 v1(40.767,32.131)
  Top Layer w0.5: S4.1@16.75,27.25 18.703,29.203 R91.1@19.126,29.203
  Bottom Layer w0.2: v1(35.56,31.877) 40.513,31.877 v1(40.767,32.131)
NetR91_1: R99.1 U1.6 | length 24.5
  Top Layer w0.2: U1.6@25.9,62.722 27.431,62.722 28.948,61.205 28.948,45.499 R99.1@32.588,41.859
NetR92_1: R92.1 S3.1 U1.1 | length 50.7
  Top Layer w0.2: R92.1@-0.94,29.203 -0.94,31.826 4.807,37.573 8.929,37.573 19.146,47.79 23.071,47.79 26.797,51.516 26.797,59.301 U1.1@25.9,60.198
  Top Layer w0.5: S3.1@-3.25,27.25 -2.893,27.25 R92.1@-0.94,29.203
NetR93_1: R93.1 S2.1 U1.60 | length 66.2
  Top Layer w0.2: R93.1@-21.006,29.203 -21.006,30.937 -17.405,34.538 -16.216,34.538 -14.04,36.714 -14.04,39.704 -8.608,45.136 12.428,45.136 17.882,50.59 21.911,50.59 23.368,52.047 23.368,53.975 21.471,55.872 U1.60@21.471,57.793
  Top Layer w0.5: S2.1@-23.25,27.25 -22.959,27.25 R93.1@-21.006,29.203
NetR94_1: R94.1 S1.1 U1.59 | length 85.5
  Top Layer w0.2: R94.1@-40.564,29.203 -40.564,30.556 -38.989,32.131 -20.378,32.131 -17.571,34.938 -16.382,34.938 -14.44,36.88 -14.44,39.87 -8.774,45.536 12.262,45.536 17.716,50.99 21.746,50.99 22.968,52.212 22.968,53.809 20.971,55.806 U1.59@20.971,57.793
  Top Layer w0.5: S1.1@-43.25,27.25 -42.517,27.25 R94.1@-40.564,29.203
NetR95_1: R96.1 U1.58 | length 61.3
  Top Layer w0.2: R96.1@-7.544,33.858 -9.646,35.961 -9.646,41.269 -7.78,43.136 13.256,43.136 18.71,48.59 22.74,48.59 25.368,51.218 25.368,54.803 23.945,56.226 23.945,59.167 23.422,59.69 20.955,59.69 20.455,59.19 U1.58@20.455,57.793
NetR96_1: R95.1 U1.2 | length 52.2
  Top Layer w0.2: R95.1@-7.544,41.732 -3.785,37.973 8.763,37.973 18.98,48.19 22.905,48.19 25.768,51.053 25.768,58.814 25.146,59.436 24.834,59.748 24.526,59.748 24.257,60.017 24.257,60.379 24.526,60.648 25.85,60.648 U1.2@25.9,60.698
NetR97_1: R98.1 U1.3 | length 35.1
  Top Layer w0.2: R98.1@15.545,35.687 14.402,36.83 14.402,42.48 19.311,47.39 23.237,47.39 27.45,51.604 27.45,61.006 27.25,61.206 U1.3@25.9,61.206
NetR98_1: R97.1 U1.4 | length 26.2
  Top Layer w0.2: R97.1@18.136,43.485 18.136,45.649 19.477,46.99 23.402,46.99 27.932,51.52 27.932,61.09 27.316,61.706 U1.4@25.9,61.706
NetR99_1: R100.1 U1.5 | length 31.9
  Top Layer w0.2: U1.5@25.9,62.222 27.366,62.222 28.448,61.14 28.448,37.871 R100.1@32.461,33.858
NetR100_1: R90.1 S5.1 U1.16 | length 55.4
  Top Layer w0.2: U1.16@25.9,67.794 27.25,67.794 28.29,68.834 32.436,68.834 41.751,59.519 41.751,31.972 41.148,31.369 39.878,31.369 39.065,30.556 R90.1@39.065,29.203
  Top Layer w0.5: S5.1@36.75,27.25 37.112,27.25 R90.1@39.065,29.203
NetR109_1: R109.1 U1.61 | length 94.7
  Top Layer w0.2: R109.1@-38.43,16.797 -36.431,18.796 -14.986,18.796 -13.589,20.193 -13.589,39.59 -8.443,44.736 12.593,44.736 18.047,50.19 22.077,50.19 23.768,51.881 23.768,54.141 21.987,55.922 U1.61@21.987,57.793
NetR110_1: R110.1 U1.62 | length 93.5
  Top Layer w0.2: R110.1@-36.373,16.803 -36.273,16.903 -36.273,17.456 -35.433,18.296 -14.92,18.296 -13.189,20.027 -13.189,39.424 -8.277,44.336 12.759,44.336 18.213,49.79 22.243,49.79 24.168,51.715 24.168,54.306 22.487,55.987 U1.62@22.487,57.793
NetR111_1: R111.1 U1.63 | length 72
  Top Layer w0.2: R111.1@-13.284,16.797 -13.284,17.297 -12.789,17.792 -12.789,39.258 -8.111,43.936 12.925,43.936 18.379,49.39 22.408,49.39 24.568,51.55 24.568,54.472 22.995,56.045 U1.63@22.995,57.793
NetR112_1: R112.1 U1.64 | length 72.1
  Top Layer w0.2: R112.1@-11.608,16.803 -12.41,17.605 -12.389,17.626 -12.389,39.093 -7.946,43.536 13.09,43.536 18.544,48.99 22.574,48.99 24.968,51.384 24.968,54.638 23.495,56.111 U1.64@23.495,57.793
NetR113_1: R113.1 U1.11 | length 77.7
  Top Layer w0.2: R113.1@11.735,16.797 11.835,16.897 11.835,17.461 13.423,19.05 23.73,19.05 36.938,32.258 38.1,32.258 39.751,33.909 39.751,58.69 32.139,66.302 28.587,66.302 27.547,65.262 U1.11@25.9,65.262
NetR114_1: R114.1 U1.12 | length 77
  Top Layer w0.2: R114.1@13.538,16.803 13.538,17.348 14.84,18.65 23.896,18.65 37.104,31.858 38.266,31.858 40.151,33.743 40.151,58.856 32.205,66.802 28.521,66.802 27.481,65.762 U1.12@25.9,65.762
NetR115_1: R115.1 U1.13 | length 65.7
  Top Layer w0.2: U1.13@25.9,66.278 27.431,66.278 28.471,67.318 32.255,67.318 40.551,59.022 40.551,33.578 38.431,31.458 37.269,31.458 33.509,27.698 33.509,20.169 R115.1@36.881,16.797
NetR116_1: R116.1 U1.14 | length 66.9
  Top Layer w0.2: U1.14@25.9,66.778 27.366,66.778 28.406,67.818 32.32,67.818 40.951,59.187 40.951,33.412 38.597,31.058 37.435,31.058 33.909,27.532 33.909,21.197 R116.1@38.303,16.803
NetU1_47: U1.47 U9.10 | length 70.7
  Top Layer w0.2: U9.10@-39.425,59.995 -38.608,60.812 v1(-38.608,64.643) ; v1(11.557,61.214) 11.684,61.214 11.95,60.948 11.95,60.932 12.126,60.756 13.442,60.756 U1.47@13.5,60.698
  Bottom Layer w0.2: v1(-38.608,64.643) -38.608,64.994 -39.233,65.618 -39.233,66.461 -39.243,66.472 -38.557,67.158 -36.964,67.158 -34.176,69.945 -31.56,69.945 -28.823,72.682 -25.764,72.682 -25.738,72.656 -23.792,72.656 -23.766,72.682 5.804,72.682 11.557,66.929 v1(11.557,61.214)
NetU1_48: U1.48 U9.1 | length 74.3
  Top Layer w0.2: U9.1@-44.27,59.997 U9.1@-44.272,59.995 -44.272,63.373 -43.205,64.44 -40.03,64.44 v1(-38.583,65.888) ; v1(11.557,60.198) 11.462,60.198 11.335,60.325 11.462,60.452 11.716,60.198 U1.48@13.5,60.198
  Bottom Layer w0.2: v1(-38.583,65.888) -37.821,66.65 -36.906,66.65 -34.011,69.545 -31.394,69.545 -28.658,72.282 -25.93,72.282 -25.904,72.256 -23.626,72.256 -23.6,72.282 5.638,72.282 11.049,66.871 11.049,61.767 10.907,61.625 10.907,60.945 11.557,60.295 v1(11.557,60.198)
pads on no net: Display1.0 Display1.11 Display1.12 Display1.13 Display1.14 EA.0 EB.0 EC.0 ED.0 J1.0 J1.6 J2.0 J2.1 J2.2 J2.3 J3.0 J3.1 J3.3 P9.0 S1.3 S1.4 S2.3 S2.4 S3.3 S3.4 S4.3 S4.4 S5.3 S5.4 U1.8 U1.22 U1.33 U1.34 U1.35 U1.36 U1.37 U1.42 U1.43 U1.44 U1.45 U2.1@-3.048,82.55 U2.9 U2.10 U2.14 U2.16 U3.0 U3A.0 U3B.0 U3C.0 U3D.0 U4.0 U4A.0 U4B.0 U4C.0 U4D.0 U5.0 U5A.0 U5B.0 U5C.0 U5D.0 U6.0 U6A.0 U6B.0 U6C.0 U6D.0 U7B1.1 U7B1.2 U7B1.3 U7B1.4 U7B1.5 U8A.2 U8C1.1 U8C1.2 U8C2.9 U8C2.10 U8C3.9 U8C3.10 U10.1 U10.4 VR4.

## Polygon pours and split planes (outlines as drawn)
GND on Bottom Layer "Bottom Layer-No Net" (solid, pour order 4): 50.521,0.102 50.495,0.102 50.063,-0.33 49.962,-0.432 -49.936,-0.432 -50.19,-0.432 -50.8,0.178 -50.673,0.305 -50.673,109.093 -50.673,109.347 -49.327,110.693 49.073,110.693 49.073,110.592 50.444,109.22

## Text inside footprints (layer, text, board x,y; h text height)
D1: Top Overlay "~" at -43.942,99.949 h0.8 r330; Top Overlay "~" at -41.783,100.076 h0.8 r330
Output: Top Overlay "1" at -46.863,49.53 h0.8 r270
Power: Top Overlay "1" at -46.228,104.648 h0.8